# Altium PCB WheelLED_LiLED_Pcb.PcbDoc
Units mil, origin at the board's own origin, x right, y up, seen from the top; angles counter-clockwise.
Board outline 1220 x 270 mil, 2 copper layers (Top Layer, Bottom Layer); 8 components, 2 nets, 17 pads, 0 vias.
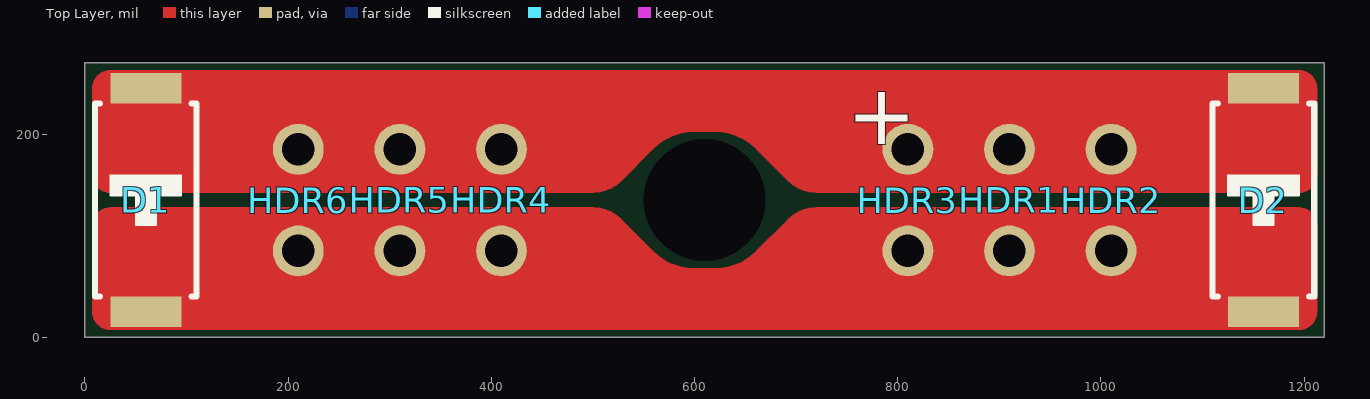
[diagram p0: Top Layer view]
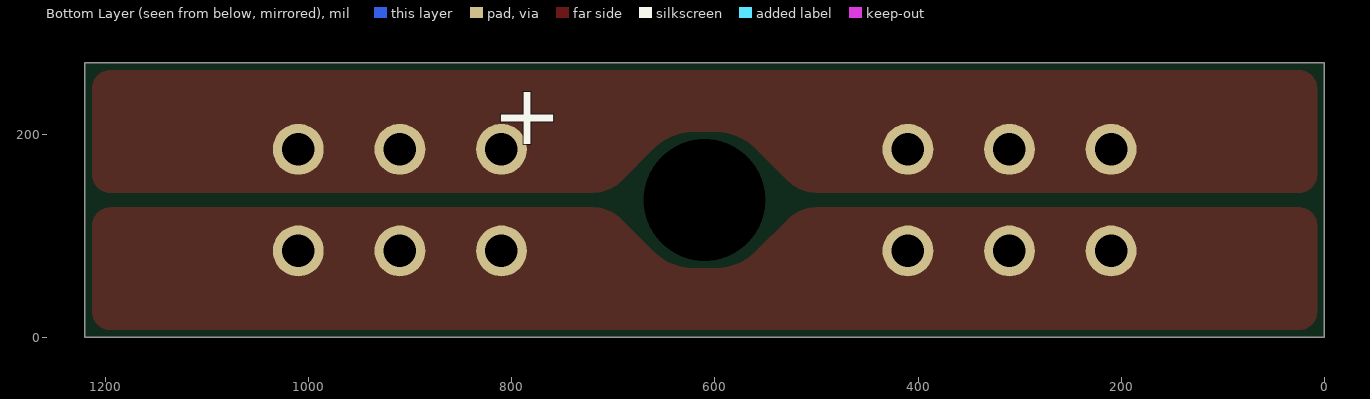
[diagram p1: Bottom Layer view, seen from below]
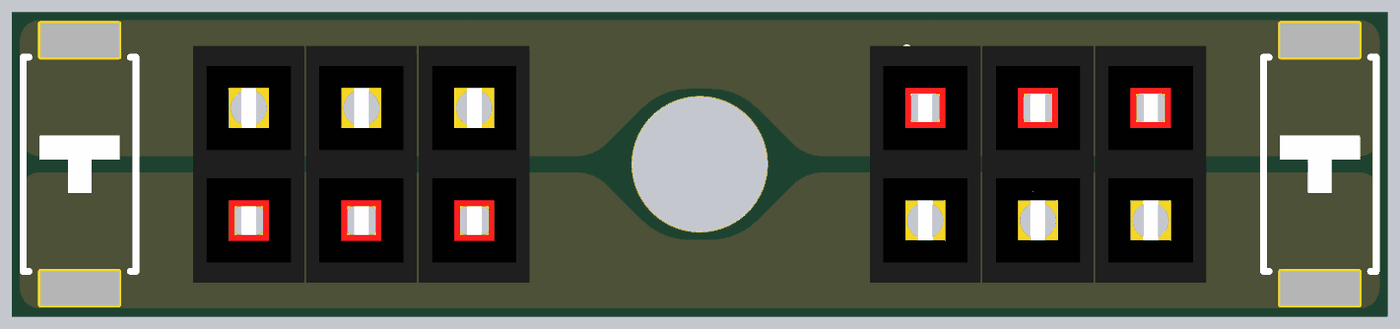
[diagram p2: 3D render of the assembled board from above, using the file's embedded part models]

## Layer stack, top to bottom
Top Solder: solder mask 0.4, Solder Resist, Dk 3.5
Top Layer: signal copper 1.4
Dielectric1: dielectric 12.6, FR-4, Dk 4.8
Bottom Layer: signal copper 1.4
Bottom Solder: solder mask 0.4, Solder Resist, Dk 3.5

## Board outline
0,0 1220,0 1220,270 0,270

## Design rules (kind name [scope] priority, off if disabled: settings)
Clearance ClearancePolygon [InPolygon] p1: gap=6
Clearance [All] p2: gap=6
ComponentClearance [All] p1: gap=0 collisioncheckmode=3 verticalgap=0 showdistances=FALSE
Height [All] p1: minheight=0 maxheight=5000 prefheight=500
HoleSize [All] p1: absolutevalues=TRUE maxlimit=200 minlimit=1 maxpercent=80.000 minpercent=20.000
HoleToHoleClearance [All] p1: gap=6 allowstackedmicrovias=TRUE
MinimumSolderMaskSliver [All] p1: minsoldermaskwidth=4
PlaneConnect [All] p1: planeconnectstyle=Direct reliefexpansion=20 reliefentries=4 reliefconductorwidth=20 reliefairgap=10
PolygonConnect [All] p1: connectstyle=Direct reliefconductorwidth=20 reliefentries=4 polygonreliefangle="90 Angle" airgapwidth=10
RoutingVias [All] p1: holewidth=12 width=20 viastyle="Through Hole" minholewidth=12 minwidth=20 maxholewidth=100 maxwidth=200
SilkToSilkClearance [All] p1: silktosilkclearance=0
SilkToSolderMaskClearance SilkscreenOverComponentPads [IsPad] p1: minsilkscreentomaskgap=1 clearancetoexposedcopper=TRUE
SolderMaskExpansion [All] p1: expansion=2
Width [All] p1: maxlimit=64 minlimit=6 preferedwidth=10
22 further rules are at their usual default settings.

## Classes and differential pairs
component class WheelLED_LiLED_Sch: D1 D2 HDR1

## Components (designator, comment, footprint, x,y, rotation, side; value= is the part's Value field where it differs from the comment)
D1 "LED_5730" LED_5730_WHITE 60,135 r270 top
D2 "LED_5730" LED_5730_WHITE 1160,135 r270 top
HDR1 "HDR1x2_2.54" HDR1X2_2.54_180F 910,185 r0 top
HDR2 "HDR1x2_2.54" HDR1X2_2.54_180F 1010,185 r0 top (schematic designator HDR1)
HDR3 "HDR1x2_2.54" HDR1X2_2.54_180F 810,185 r0 top (schematic designator HDR1)
HDR4 "HDR1x2_2.54" HDR1X2_2.54_180F 410,85 r180 top (schematic designator HDR1)
HDR5 "HDR1x2_2.54" HDR1X2_2.54_180F 310,85 r180 top (schematic designator HDR1)
HDR6 "HDR1x2_2.54" HDR1X2_2.54_180F 210,85 r180 top (schematic designator HDR1)

## Footprints (in the part's own frame and the unit in brackets; to place one, negate y for a bottom-side part, rotate by r counter-clockwise, add the part's x,y. Pads: shape width x height; smd on the part's side, far side on the other; paste and mask are expansions set on the pad)
HDR1X2_2.54_180F [mil]
  round 50 hole 32: 1(0,0) 2(0,-100)
  body extent -49,-155 49,55, height 335
LED_5730_WHITE [mil]
  rect 30x70 smd: 1(-110,0) 2(110,0)
  silkscreen extent -95,-50 95,50

## Part data
D1 D2: "LED"
HDR1 HDR2 HDR3 HDR4 HDR5 HDR6: library part HDR1x2_2.54T, "Header"

## Free pads (board coordinates)
  round 60 hole 120: 0(610,135)

## Nets (pads, with @x,y where several pads share a name; then routed paths per layer and width w, separated by ;. In a path a pad name is that pad's centre, name@x,y a point inside that pad or via, vN(x,y) a via of type N, cw(c..) or ccw(c..) an arc to the next point about the centre after c; other vN are vias at no path point)
GND: D1.2 D2.2 HDR1.2 HDR2.2 HDR3.2 HDR4.1 HDR5.1 HDR6.1 | length 2645.6
  Top Layer w6: 10,25 ccw(c25,25) 25,10 1195,10 ccw(c1195,25) 1210,25 1210,110 ccw(c1195,110) 1195,125 720,125 ccw(c720,88.43) 694.14,114.29 662.43,82.57 cw(c620,125) 620,65 600,65 cw(c600,125) 557.57,82.57 525.86,114.29 ccw(c500,88.43) 500,125 25,125 ccw(c25,110) 10,110 10,25
NetD1_1: D1.1 D2.1 HDR1.1 HDR2.1 HDR3.1 HDR4.2 HDR5.2 HDR6.2 | length 2645.6
  Top Layer w6: 10,160 ccw(c25,160) 25,145 500,145 ccw(c500,181.57) 525.86,155.71 557.57,187.43 cw(c600,145) 600,205 620,205 cw(c620,145) 662.43,187.43 694.14,155.71 ccw(c720,181.57) 720,145 1195,145 ccw(c1195,160) 1210,160 1210,245 ccw(c1195,245) 1195,260 25,260 ccw(c25,245) 10,245 10,160

## Polygon pours and split planes (outlines as drawn)
GND on Top Layer "Bottom Layer-No Net" (hatched 45Degree grid 4 track 6, remove dead copper, shelved, pour order 9): 8623.35,-227.5 ccw(c8608.35,-227.5) 8608.35,-212.5 6837.24,-212.5 6828.67,-212.5 ccw(c6828.66,-312.49) 6757.95,-241.79 6733.35,-266.4 6696.53,-303.21 cw(c6625.83,-232.51) 6625.82,-332.5 6553.35,-332.5 6188.67,-332.5 cw(c6188.67,-232.5) 6117.95,-303.21 6088.35,-273.6 6056.53,-241.79 ccw(c5985.83,-312.49) 5985.82,-212.5 5843.35,-212.5 2190.87,-212.5 ccw(c2190.86,-312.49) 2120.16,-241.79 2093.35,-268.6 2058.74,-303.21 cw(c1988.03,-232.51) 1988.03,-332.5 1768.35,-332.5 1550.87,-332.5 cw(c1550.87,-232.5) 1480.16,-303.21 1454.45,-277.5 1418.74,-241.79 ccw(c1348.03,-312.49) 1348.03,-212.5 1043.35,-212.5 -401.65,-212.5 ccw(c-401.66,-227.5) -416.65,-227.5 -416.65,-407.5 ccw(c-401.65,-407.5) -401.65,-422.5 -346.65,-422.5 -330.87,-422.5 cw(c-330.87,-522.49) -260.16,-451.79 -226.65,-485.3 -203.74,-508.21 ccw(c-123.8,-432.31) -126.65,-542.5 3668.35,-542.5 ccw(c3664.27,-436.04) 3742.63,-508.21 3783.35,-467.5 3799.06,-451.79 cw(c3869.76,-522.49) 3869.77,-422.5 3918.35,-422.5 4306.92,-422.5 cw(c4306.93,-522.48) 4377.64,-451.79 4413.35,-487.5 4439.06,-513.21 ccw(c4509.77,-442.5) 4509.77,-542.5 8258.35,-542.5 8304.72,-542.5 ccw(c8304.72,-442.5) 8375.43,-513.21 8403.35,-485.3 8436.85,-451.79 cw(c8507.56,-522.49) 8507.56,-422.5 8568.35,-422.5 8608.35,-422.5 ccw(c8608.35,-407.5) 8623.35,-407.5
GND on Bottom Layer "Bottom Layer-No Net" (hatched 45Degree grid 4 track 6, remove dead copper, shelved, pour order 10): 8623.35,-227.5 ccw(c8608.35,-227.5) 8608.35,-212.5 6837.24,-212.5 6828.67,-212.5 ccw(c6828.66,-312.49) 6757.95,-241.79 6733.35,-266.4 6696.53,-303.21 cw(c6625.83,-232.51) 6625.82,-332.5 6553.35,-332.5 6188.67,-332.5 cw(c6188.67,-232.5) 6117.95,-303.21 6088.35,-273.6 6056.53,-241.79 ccw(c5985.83,-312.49) 5985.82,-212.5 5843.35,-212.5 2190.87,-212.5 ccw(c2190.86,-312.49) 2120.16,-241.79 2093.35,-268.6 2058.74,-303.21 cw(c1988.03,-232.51) 1988.03,-332.5 1768.35,-332.5 1550.87,-332.5 cw(c1550.87,-232.5) 1480.16,-303.21 1454.45,-277.5 1418.74,-241.79 ccw(c1348.03,-312.49) 1348.03,-212.5 1043.35,-212.5 -401.65,-212.5 ccw(c-401.66,-227.5) -416.65,-227.5 -416.65,-407.5 ccw(c-401.65,-407.5) -401.65,-422.5 -346.65,-422.5 -330.87,-422.5 cw(c-330.87,-522.49) -260.16,-451.79 -226.65,-485.3 -203.74,-508.21 ccw(c-123.8,-432.31) -126.65,-542.5 3668.35,-542.5 ccw(c3664.27,-436.04) 3742.63,-508.21 3783.35,-467.5 3799.06,-451.79 cw(c3869.76,-522.49) 3869.77,-422.5 3918.35,-422.5 4306.92,-422.5 cw(c4306.93,-522.48) 4377.64,-451.79 4413.35,-487.5 4439.06,-513.21 ccw(c4509.77,-442.5) 4509.77,-542.5 8258.35,-542.5 8304.72,-542.5 ccw(c8304.72,-442.5) 8375.43,-513.21 8403.35,-485.3 8436.85,-451.79 cw(c8507.56,-522.49) 8507.56,-422.5 8568.35,-422.5 8608.35,-422.5 ccw(c8608.35,-407.5) 8623.35,-407.5
GND on T-Component "Bottom Layer-No Net" (hatched 45Degree grid 4 track 6, remove dead copper, shelved): 8623.35,-227.5 ccw(c8608.35,-227.5) 8608.35,-212.5 6837.24,-212.5 6828.67,-212.5 ccw(c6828.66,-312.49) 6757.95,-241.79 6733.35,-266.4 6696.53,-303.21 cw(c6625.83,-232.51) 6625.82,-332.5 6553.35,-332.5 6188.67,-332.5 cw(c6188.67,-232.5) 6117.95,-303.21 6088.35,-273.6 6056.53,-241.79 ccw(c5985.83,-312.49) 5985.82,-212.5 5843.35,-212.5 2190.87,-212.5 ccw(c2190.87,-312.49) 2120.16,-241.79 2093.35,-268.6 2058.74,-303.21 cw(c1988.03,-232.51) 1988.03,-332.5 1768.35,-332.5 1550.87,-332.5 cw(c1550.87,-232.5) 1480.16,-303.21 1454.45,-277.5 1418.74,-241.79 ccw(c1348.04,-312.49) 1348.03,-212.5 1043.35,-212.5 -401.65,-212.5 ccw(c-401.66,-227.5) -416.65,-227.5 -416.65,-407.5 ccw(c-401.66,-407.5) -401.65,-422.5 -346.65,-422.5 -330.87,-422.5 cw(c-330.87,-522.49) -260.16,-451.79 -226.65,-485.3 -203.74,-508.21 ccw(c-123.8,-432.31) -126.65,-542.5 3668.35,-542.5 ccw(c3664.27,-436.04) 3742.63,-508.21 3783.35,-467.5 3799.06,-451.79 cw(c3869.76,-522.49) 3869.77,-422.5 3918.35,-422.5 4306.92,-422.5 cw(c4306.93,-522.48) 4377.64,-451.79 4413.35,-487.5 4439.06,-513.21 ccw(c4509.77,-442.5) 4509.77,-542.5 8258.35,-542.5 8304.72,-542.5 ccw(c8304.72,-442.5) 8375.43,-513.21 8403.35,-485.3 8436.85,-451.79 cw(c8507.56,-522.49) 8507.56,-422.5 8568.35,-422.5 8608.35,-422.5 ccw(c8608.35,-407.5) 8623.35,-407.5

## Other copper
Top Layer:
  region net NetD1_1: 25,145 500,145 ccw(c500,181.57) 525.86,155.71 557.57,187.43 cw(c600,145) 600,205 620,205 cw(c620,145) 662.43,187.43 694.14,155.71 ccw(c720,181.57) 720,145 1195,145 ccw(c1195,160) 1210,160 1210,245 ccw(c1195,245) 1195,260 25,260 ccw(c25,245) 10,245 10,160 ccw(c25,160)
  region net GND: 10,25 ccw(c25,25) 25,10 1195,10 ccw(c1195,25) 1210,25 1210,110 ccw(c1195,110) 1195,125 720,125 ccw(c720,88.43) 694.14,114.29 662.43,82.57 cw(c620,125) 620,65 600,65 cw(c600,125) 557.57,82.57 525.86,114.29 ccw(c500,88.43) 500,125 25,125 ccw(c25,110) 10,110

## Silkscreen, mask and mechanical layers (free items; w line width, h text height)
Top Overlay:
  text "+" at 750,190 h60
Bottom Overlay:
  text "+" at 750,190 h60
Mechanical 4:
  lines w10: 410,10 410,260 810,260 810,10 410,10